# EAGLE board triple8_v2 (EAGLE 5.06)
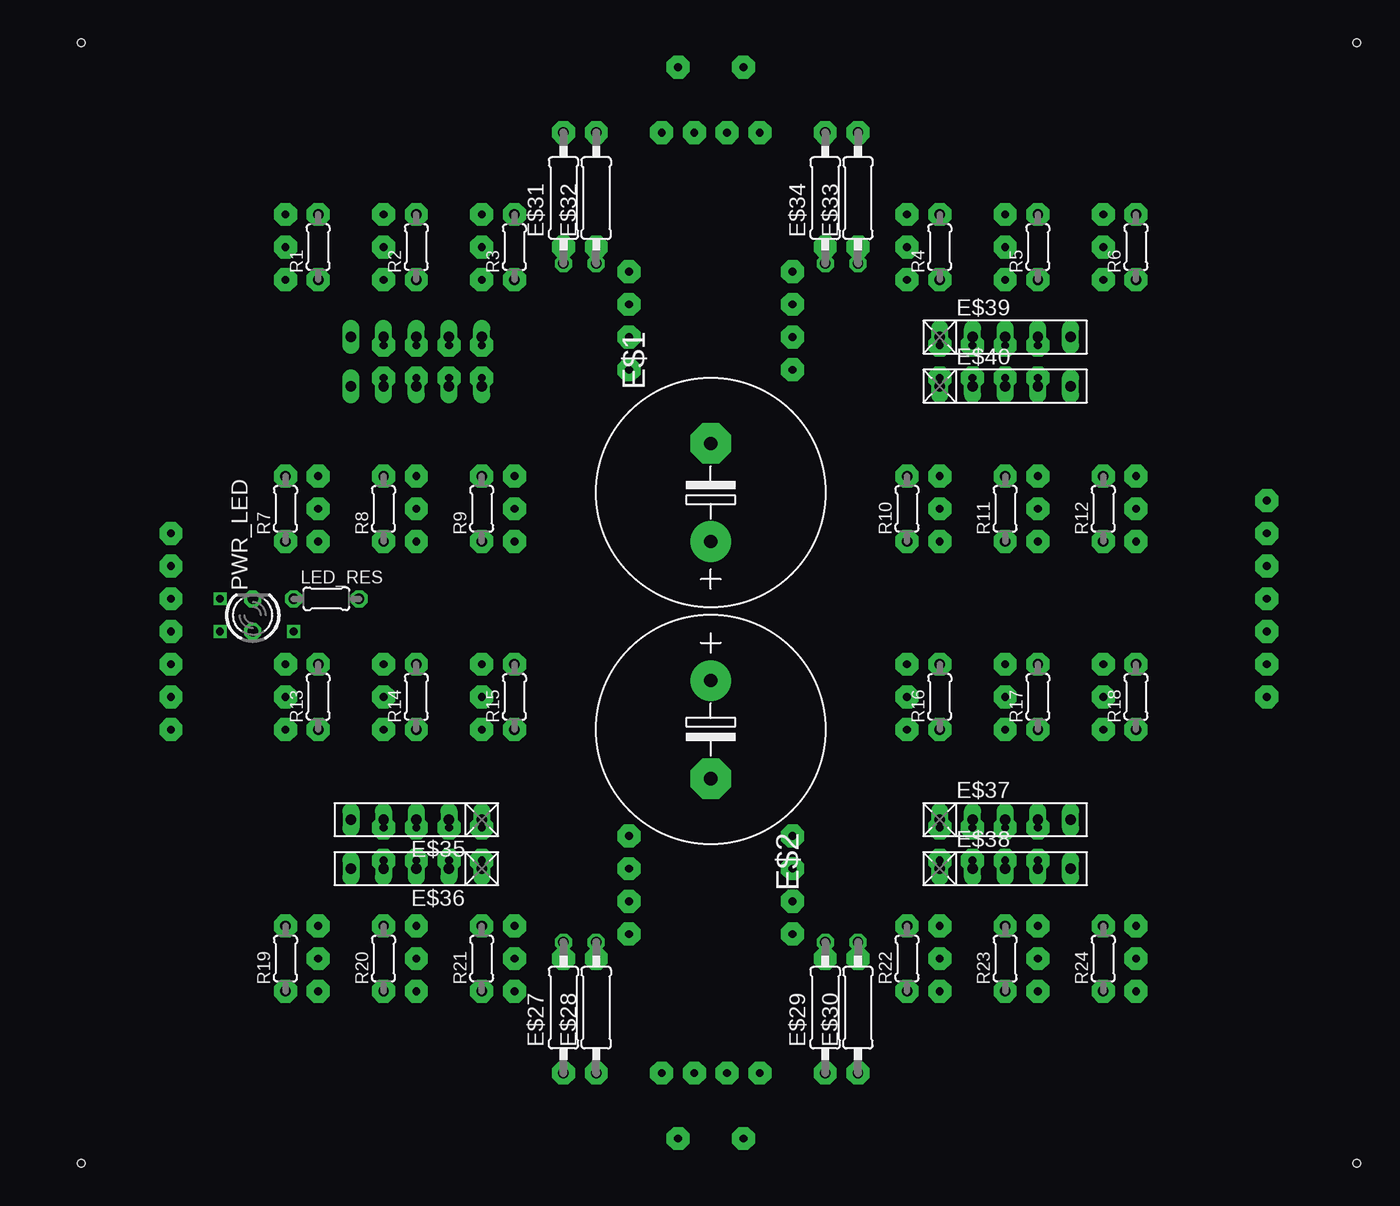
[diagram p0: board, top side]
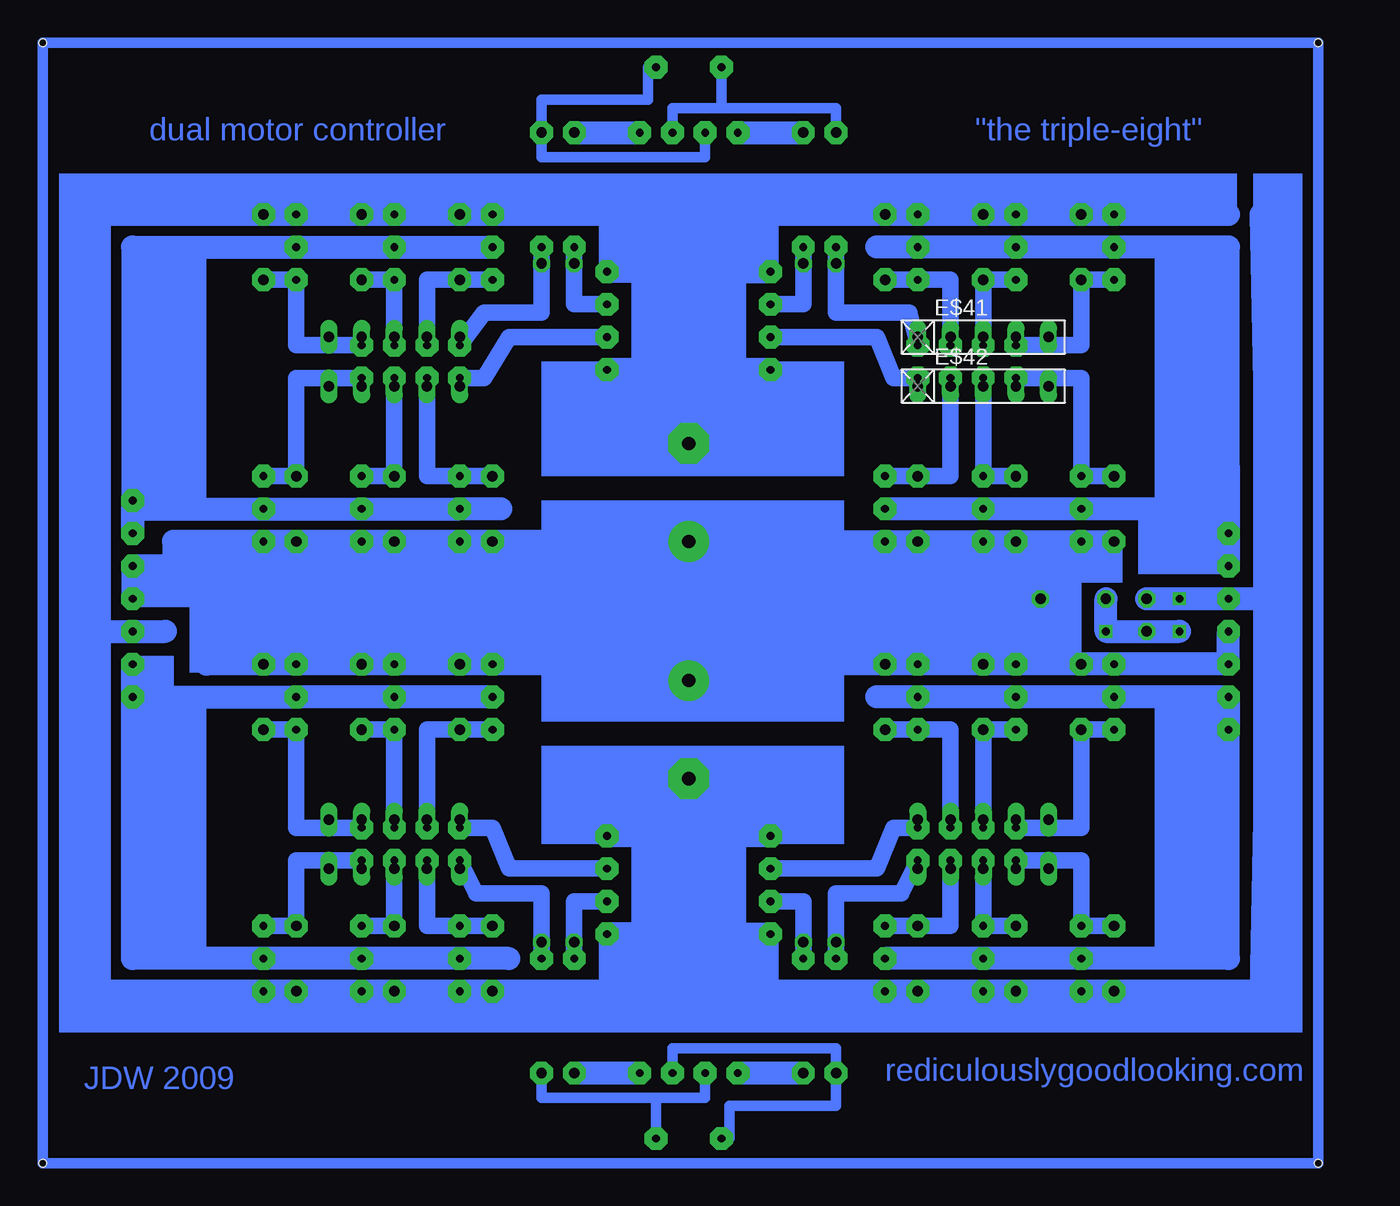
[diagram p1: board, bottom side, seen from below]

No outline drawn. Coordinates in mm, seen from the top.
Copper layers (1*16): Top 0.035mm / dielectric 1.5mm / Bottom 0.035mm
Design rules "default": minimum track width 10mil, minimum drill 24mil, track to track 8mil, track to pad 8mil, pad to pad 8mil, via to via 8mil, smd to smd 8mil, copper to edge 40mil, drill to drill 8mil, minimum pad ring 10mil, minimum via ring 8mil, stop-mask expansion 4mil, vias tented up to drill 0mil, thermal gap 10mil
Holes 0.6 mm at 0,0 0,87 99.06,87 99.06,0

## Footprints (pad centres in the part's own frame; a part is rotated, then mirrored left to right if it is on the bottom)
E7,5-18 = drill 1.016 pad 3.15 round: + -3.81,0 | drill 1.016 pad 3.15 octagon: - 3.81,0
0207/10 = drill 0.813 octagon: 1 -5.08,0; 2 5.08,0
RN-5 = drill 0.813 long: 1 -5.08,0; 2 -2.54,0; 3 0,0; 4 2.54,0; 5 5.08,0
0204/5 = drill 0.813 octagon: 1 -2.54,0; 2 2.54,0
LED3MM = drill 0.813 octagon: A -1.27,0; K 1.27,0

## Placement (x,y rotation side)
E$1  [E7,5-18]  48.9,52.07 90 top
E$2  [E7,5-18]  48.9,33.66 270 top
E$27  [0207/10]  37.47,12.06 90 top
E$28  [0207/10]  40.01,12.06 90 top
E$29  [0207/10]  57.78,12.06 90 top
E$30  [0207/10]  60.33,12.06 90 top
E$31  [0207/10]  37.47,74.93 90 top
E$32  [0207/10]  40.01,74.93 90 top
E$33  [0207/10]  60.33,74.93 90 top
E$34  [0207/10]  57.78,74.93 90 top
E$35  [RN-5]  26.04,26.67 180 top
E$36  [RN-5]  26.04,22.86 180 top
E$37  [RN-5]  71.75,26.67 0 top
E$38  [RN-5]  71.75,22.86 0 top
E$39  [RN-5]  71.75,64.14 0 top
E$40  [RN-5]  71.75,60.33 0 top
E$41  [RN-5]  26.04,64.14 0 bottom
E$42  [RN-5]  26.04,60.33 0 bottom
LED_RES  [0204/5]  19.05,43.81 0 top
PWR_LED  [LED3MM]  13.34,42.55 90 top
R1  [0204/5]  18.41,71.12 90 top
R2  [0204/5]  26.04,71.12 90 top
R3  [0204/5]  33.66,71.12 90 top
R4  [0204/5]  66.67,71.12 90 top
R5  [0204/5]  74.3,71.12 90 top
R6  [0204/5]  81.92,71.12 90 top
R7  [0204/5]  15.88,50.8 90 top
R8  [0204/5]  23.5,50.8 90 top
R9  [0204/5]  31.11,50.8 90 top
R10  [0204/5]  64.14,50.8 90 top
R11  [0204/5]  71.75,50.8 90 top
R12  [0204/5]  79.38,50.8 90 top
R13  [0204/5]  18.41,36.2 90 top
R14  [0204/5]  26.04,36.2 90 top
R15  [0204/5]  33.66,36.2 90 top
R16  [0204/5]  66.67,36.2 90 top
R17  [0204/5]  74.3,36.2 90 top
R18  [0204/5]  81.92,36.2 90 top
R19  [0204/5]  15.88,15.88 90 top
R20  [0204/5]  23.5,15.88 90 top
R21  [0204/5]  31.11,15.88 90 top
R22  [0204/5]  64.14,15.88 90 top
R23  [0204/5]  71.75,15.88 90 top
R24  [0204/5]  79.38,15.88 90 top

## Library data of the parts
E$1 E$2 E$27-E$34 LED_RES R1-R24 = rcl
E$35-E$42 = resistor-net
PWR_LED = led

## Nets
S$54: LED_RES.1

## Tracks (layer width: path | path; a pad name or v marks a point on that pad's centre or on a via)
S$1  (via drill 0.6 pad 1.78)
  Bottom 1.778: v33.66,15.88 v26.04,15.88 v18.41,15.88 6.99,15.88 v6.99,36.2 | v6.99,36.2 v15.88,36.2 v23.5,36.2 v31.11,36.2 34.29,36.2 | v6.99,36.2 v6.99,33.66
S$2  (via drill 0.6 pad 1.78)
  Bottom 1.27: v42.55,20.32 40.01,20.32 v40.01,15.88
S$3  (via drill 0.6 pad 1.78)
  Bottom 1.27: v55.24,20.32 57.78,20.32 v57.78,15.88
S$4
  Bottom 0.813: 99.06,87 0,87 0,0 99.06,0 99.06,87
S$5  (via drill 0.6 pad 1.78)
  Bottom 1.778: v45.09,80.01 v40.01,80.01
S$6  (via drill 0.6 pad 1.78)
  other vias: 26.04,48.26
S$7  (via drill 0.6 pad 1.78)
  Bottom 0.813: v50.16,6.99 50.16,8.89 37.47,8.89 v37.47,6.99 37.47,4.45 45.72,4.45 45.72,1.91 v46.35,1.91
S$8  (via drill 0.6 pad 1.78)
  Bottom 1.778: v52.7,6.99 v57.78,6.99
S$9  (via drill 0.6 pad 1.78)
  other vias: 47.62,6.99
S$10  (via drill 0.6 pad 1.78)
  Bottom 0.406: v64.14,13.34 45.09,13.34 v33.66,13.34
  Bottom 1.778: 45.09,17.78 v55.24,17.78 | 45.09,17.78 v42.55,17.78 | 45.09,13.34 45.09,17.78
S$11  (via drill 0.6 pad 1.78)
  other vias: 71.75,38.73
S$12  (via drill 0.6)
  other vias: 10.79,41.27
S$13  (via drill 0.6 pad 1.78)
  Bottom 1.778: v33.66,50.8 v26.04,50.8 v18.41,50.8 12.7,50.8 12.7,48.9 6.99,48.9 | 6.99,53.98 6.99,71.12 v15.88,71.12 v23.5,71.12 v31.11,71.12 34.29,71.12 | 7.62,53.98 6.99,53.98 | 6.99,53.98 6.99,48.9 | 6.99,48.9 v6.99,46.35
S$14  (via drill 0.6 pad 1.78)
  other vias: 71.75,13.34
S$15  (via drill 0.6 pad 1.78)
  other vias: 26.04,13.34
S$16  (via drill 0.6 pad 1.78)
  Bottom 1.27: v23.5,60.96 18.41,60.96 v18.41,53.34 v15.88,53.34
S$17  (via drill 0.6 pad 1.78)
  other vias: 26.04,38.73
S$18  (via drill 0.6 pad 1.78)
  Bottom 1.27: v69.22,23.5 69.22,18.41 v66.67,18.41 v64.14,18.41
S$19  (via drill 0.6 pad 1.78)
  Bottom 1.27: v66.67,23.5 65.41,20.95 60.33,20.95 v60.33,15.88
S$20  (via drill 0.6 pad 1.78)
  Bottom 1.27: v69.22,63.5 69.22,68.58 v66.67,68.58 v64.14,68.58
S$21  (via drill 0.6 pad 1.78)
  Bottom 1.27: v26.04,60.96 v26.04,53.34 v23.5,53.34
S$22  (via drill 0.6 pad 1.78)
  other vias: 26.04,73.66
S$23  (via drill 0.6 pad 1.78)
  Bottom 1.27: v66.67,26.04 64.14,26.04 62.87,22.86 v55.24,22.86
S$24  (via drill 0.6 pad 1.78)
  other vias: 71.75,73.66
S$25  (via drill 0.6 pad 1.78)
  Bottom 1.27: v60.33,71.12 60.33,66.04 64.77,66.04 v66.67,63.5
S$26  (via drill 0.6 pad 1.78)
  Bottom 1.27: v64.14,33.66 v66.67,33.66 69.22,33.66 v69.22,26.04
S$27  (via drill 0.6 pad 1.78)
  Bottom 1.27: v26.04,63.5 v26.04,68.58 v23.5,68.58
S$28  (via drill 0.6 pad 1.78)
  Bottom 1.27: v28.57,26.04 28.57,33.66 v31.11,33.66 v33.66,33.66
S$29  (via drill 0.6 pad 1.78)
  Bottom 1.27: v42.55,22.86 34.29,22.86 33.02,26.04 v31.11,26.04
S$30  (via drill 0.6 pad 1.78)
  Bottom 1.27: v28.57,23.5 28.57,18.41 v31.11,18.41 v33.66,18.41
S$31  (via drill 0.6 pad 1.78)
  Bottom 1.778: v42.55,25.4 v55.24,25.4 v42.55,25.4
S$32  (via drill 0.6 pad 1.78)
  Bottom 1.27: v37.47,15.88 37.47,20.95 32.38,20.95 v31.11,23.5
S$33  (via drill 0.6 pad 1.78)
  Bottom 1.27: v71.75,23.5 v71.75,18.41 v74.3,18.41
S$34  (via drill 0.6 pad 1.78)
  Bottom 1.27: v69.22,60.96 69.22,53.34 v66.67,53.34 v64.14,53.34
S$35  (via drill 0.6 pad 1.78)
  Bottom 0.406: v33.66,73.66 45.72,73.66 v64.14,73.66
  Bottom 1.778: 46.35,69.22 v42.55,69.22 | 46.35,69.22 v55.24,69.22 | 45.72,73.66 46.35,69.22
S$36  (via drill 0.6 pad 1.78)
  Bottom 1.27: v71.75,63.5 v71.75,68.58 v74.3,68.58
S$37  (via drill 0.6 pad 1.78)
  Bottom 1.27: v74.3,63.5 79.38,63.5 v79.38,68.58 v81.92,68.58
S$38  (via drill 0.6 pad 1.78)
  Bottom 1.27: v55.24,66.67 57.78,66.67 v57.78,71.12
S$39  (via drill 0.6 pad 1.78)
  Bottom 1.27: v31.11,60.96 33.02,60.96 34.29,64.14 v42.55,64.14
S$40  (via drill 0.6 pad 1.78)
  Bottom 1.27: v42.55,66.67 40.01,66.67 v40.01,71.12
S$41  (via drill 0.6 pad 1.78)
  Bottom 0.813: v42.55,61.59 v55.24,61.59
  Bottom 1.778: v42.55,61.59 v55.24,61.59
S$42  (via drill 0.6 pad 1.78)
  Bottom 1.778: v40.01,6.99 v45.09,6.99
S$43  (via drill 0.6 pad 1.78)
  Bottom 0.813: v47.62,80.01 47.62,78.11 60.33,78.11 v60.33,80.01 60.33,82.55 52.07,82.55 52.07,85.09 v51.44,85.09
S$44  (via drill 0.6 pad 1.78)
  other vias: 50.16,80.01
S$45  (via drill 0.6 pad 1.78)
  Bottom 1.27: v26.04,23.5 v26.04,18.41 v23.5,18.41
S$46  (via drill 0.6 pad 1.78)
  Bottom 1.27: v23.5,23.5 18.41,23.5 v18.41,18.41 v15.88,18.41
S$47  (via drill 0.6 pad 1.78)
  Bottom 1.27: v26.04,26.04 v26.04,33.66 v23.5,33.66
S$48  (via drill 0.6 pad 1.78)
  Bottom 1.27: v23.5,26.04 18.41,26.04 v18.41,33.66 v15.88,33.66
S$49  (via drill 0.6 pad 1.78)
  Bottom 0.813: v37.47,80.01 37.47,81.92 46.35,81.92 | 50.16,80.01 50.16,81.92 46.35,81.92 | 46.35,81.92 v46.35,85.09
S$50  (via drill 0.6 pad 1.78)
  Bottom 1.27: v28.57,63.5 28.57,68.58 v31.11,68.58 v33.66,68.58
S$51  (via drill 0.6 pad 1.78)
  Bottom 1.27: v74.3,23.5 79.38,23.5 v79.38,18.41 v81.92,18.41
S$52  (via drill 0.6 pad 1.78)
  Bottom 1.27: v74.3,26.04 79.38,26.04 v79.38,33.66 v81.92,33.66
S$53  (via drill 0.6 pad 1.78)
  Bottom 1.27: v71.75,26.04 v71.75,33.66 v74.3,33.66
S$54  (via drill 0.6)
  Bottom 1.778: 10.79,41.27 v16.51,41.27 LED_RES.1
S$55  (via drill 0.6 pad 1.78)
  other vias: 6.99,38.73
S$56  (via drill 0.6 pad 1.78)
  Bottom 1.778: v57.78,80.01 v52.7,80.01
S$57  (via drill 0.6 pad 1.78)
  other vias: 71.75,48.26
S$58  (via drill 0.6 pad 1.78)
  Bottom 1.27: v31.11,63.5 31.75,66.04 37.47,66.04 v37.47,71.12
S$60  (via drill 0.6 pad 1.78)
  Bottom 1.27: v33.66,53.34 v31.11,53.34 28.57,53.34 v28.57,60.96
S$61  (via drill 0.6 pad 1.78)
  Bottom 1.27: v71.75,60.96 v71.75,53.34 v74.3,53.34
S$62  (via drill 0.6 pad 1.78)
  Bottom 1.27: v74.3,60.96 79.38,60.96 v79.38,53.34 v81.92,53.34
S$64  (via drill 0.6 pad 1.78)
  Bottom 0.406: v18.41,48.26 v23.5,48.26 v31.11,48.26 v33.66,48.26 45.09,48.26 v64.14,48.26 | v79.38,38.73 v74.3,38.73 v66.67,38.73 v64.14,38.73 45.09,38.73 v33.66,38.73
  Bottom 1.778: v92.08,43.81 v92.08,46.35 88.9,46.35 88.9,48.26 v81.92,48.26 v79.38,48.26 v74.3,48.26 v66.67,48.26 45.09,48.26 | v15.88,48.26 v18.41,48.26 v23.5,48.26 v31.11,48.26 45.09,48.26 | 45.09,38.73 v66.67,38.73 v74.3,38.73 v79.38,38.73 v81.92,38.73 86.36,38.73 | 45.09,38.73 45.09,48.26 | 45.09,38.73 v31.11,38.73 v23.5,38.73 v18.41,38.73 v15.88,38.73 6.99,38.73 v6.99,41.27
S$65  (via drill 0.6 pad 1.78)
  Bottom 1.27: v55.24,64.14 62.87,64.14 64.77,60.96 v66.67,60.96
S$67  (via drill 0.6 pad 1.78)
  Bottom 1.27: v23.5,63.5 18.41,63.5 v18.41,68.58 v15.88,68.58
S$70  (via drill 0.6 pad 1.78)
  Bottom 1.778: v92.08,36.2 v92.08,38.73 | v64.14,36.2 v71.75,36.2 v79.38,36.2 v92.08,36.2 | v92.08,36.2 92.08,15.88 v81.92,15.88 v74.3,15.88 v66.67,15.88 62.87,15.88
S$72  (via drill 0.6 pad 1.78)
  Bottom 1.778: v92.08,51.44 v92.08,48.9 | v64.14,71.12 v71.75,71.12 v79.38,71.12 92.08,71.12 v92.08,48.9 | v92.08,48.9 92.08,50.8 v81.92,50.8 v74.3,50.8 v66.67,50.8 63.5,50.8
S$73  (via drill 0.6 pad 1.78)
  Bottom 0.813: v60.33,6.99 60.33,5.08 51.44,5.08 | 47.62,6.99 47.62,5.08 51.44,5.08 | 51.44,5.08 v51.44,1.91
S$75  (via drill 0.6 pad 1.78)
  other vias: 6.99,48.9
S$79  (via drill 0.6, 0.6 pad 1.78)
  Bottom 1.778: 94.61,41.27 94.61,73.66 v81.92,73.66 v79.38,73.66 v74.3,73.66 v66.67,73.66 v31.11,73.66 v23.5,73.66 v18.41,73.66 v15.88,73.66 6.99,73.66 | 94.61,41.27 94.61,13.34 v81.92,13.34 v79.38,13.34 v74.3,13.34 v66.67,13.34 v31.11,13.34 v23.5,13.34 v18.41,13.34 v15.88,13.34 4.45,13.34 3.81,43.81 | 3.81,43.81 4.45,73.66 | 3.81,43.81 v6.99,43.81 v10.79,43.81 v13.34,43.81 | 94.61,41.27 v92.08,41.27 89.53,41.27
(copper drawn outside any net)
  shapes: Bottom area x61

## Text on the board
Bottom: "the triple-eight" | dual motor controller | rediculouslygoodlooking.com | JDW 2009